# Altium PCB compressorPCB.PcbDoc
Units mm, origin at the board's own origin, x right, y up, seen from the top; angles counter-clockwise.
Board outline 53.25 x 72 mm, 2 copper layers (Top Layer, Bottom Layer); 27 components, 29 nets, 102 pads, 2 vias.
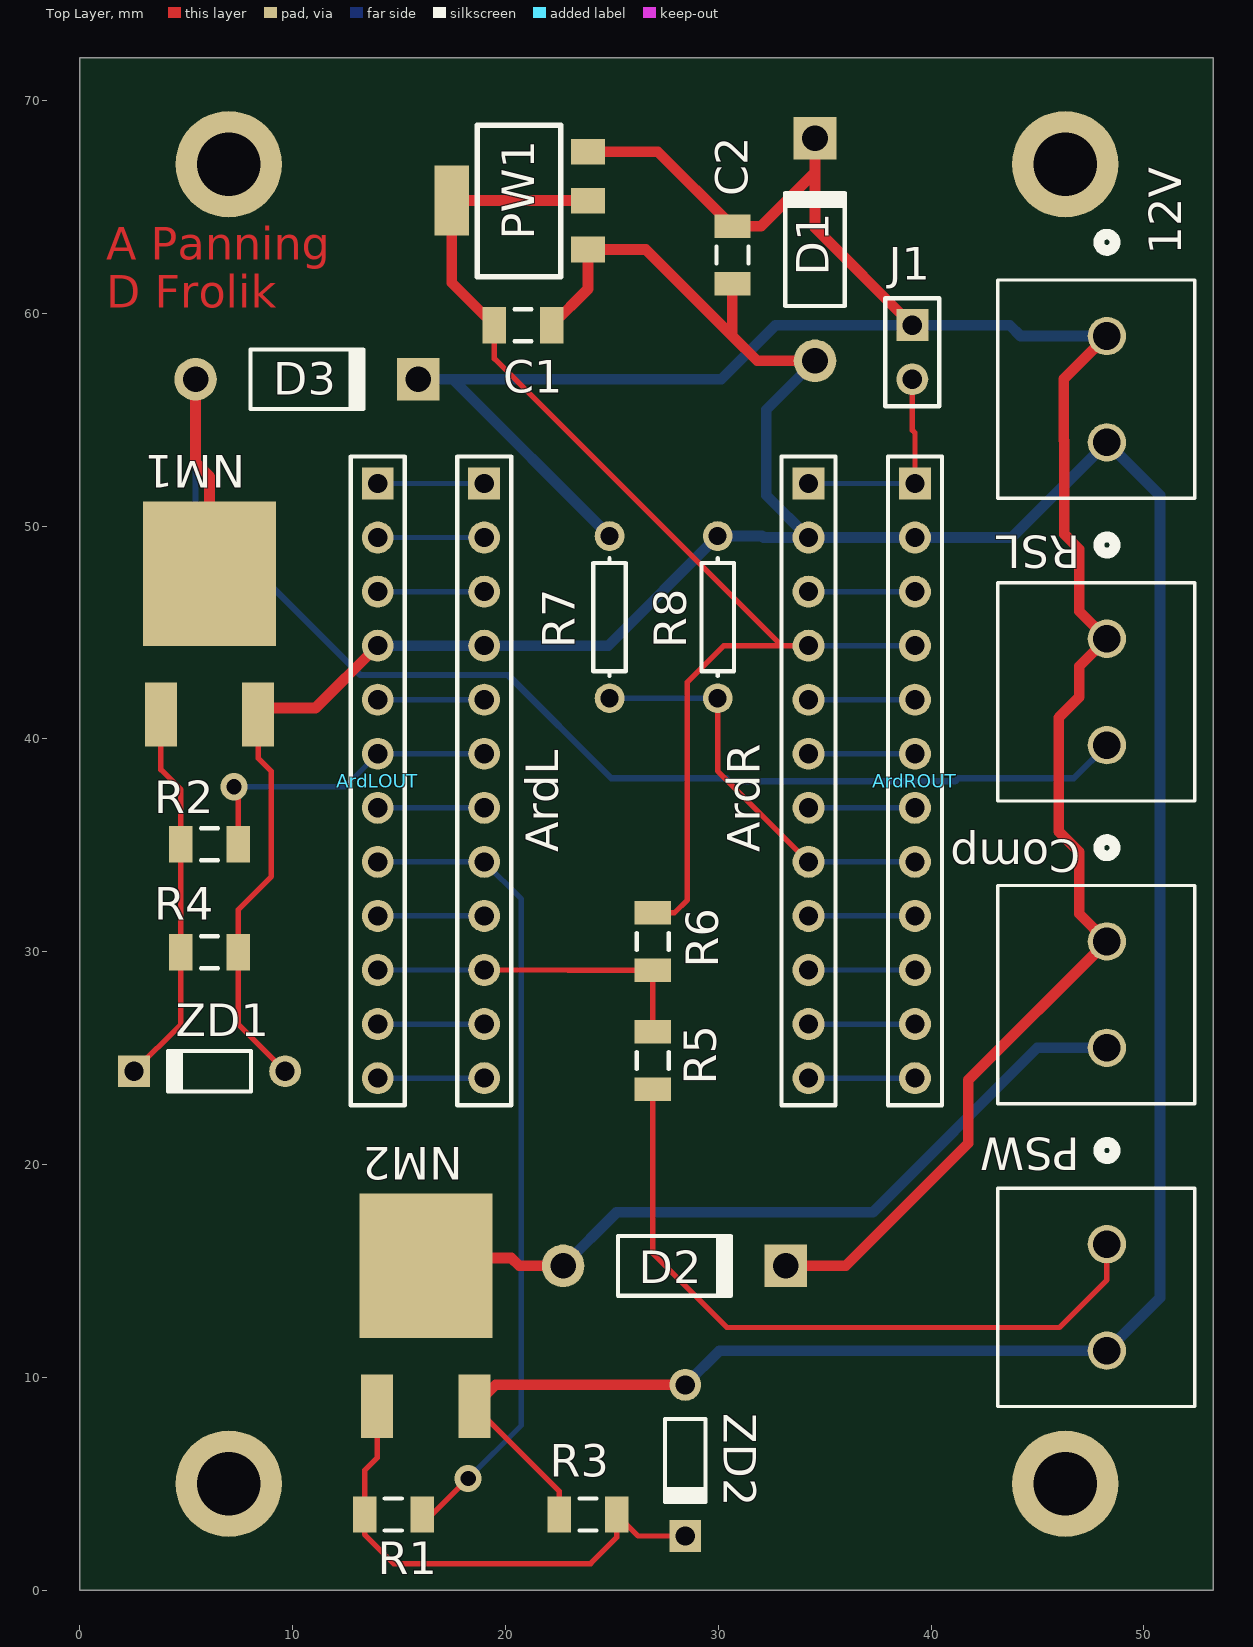
[diagram p0: Top Layer view]
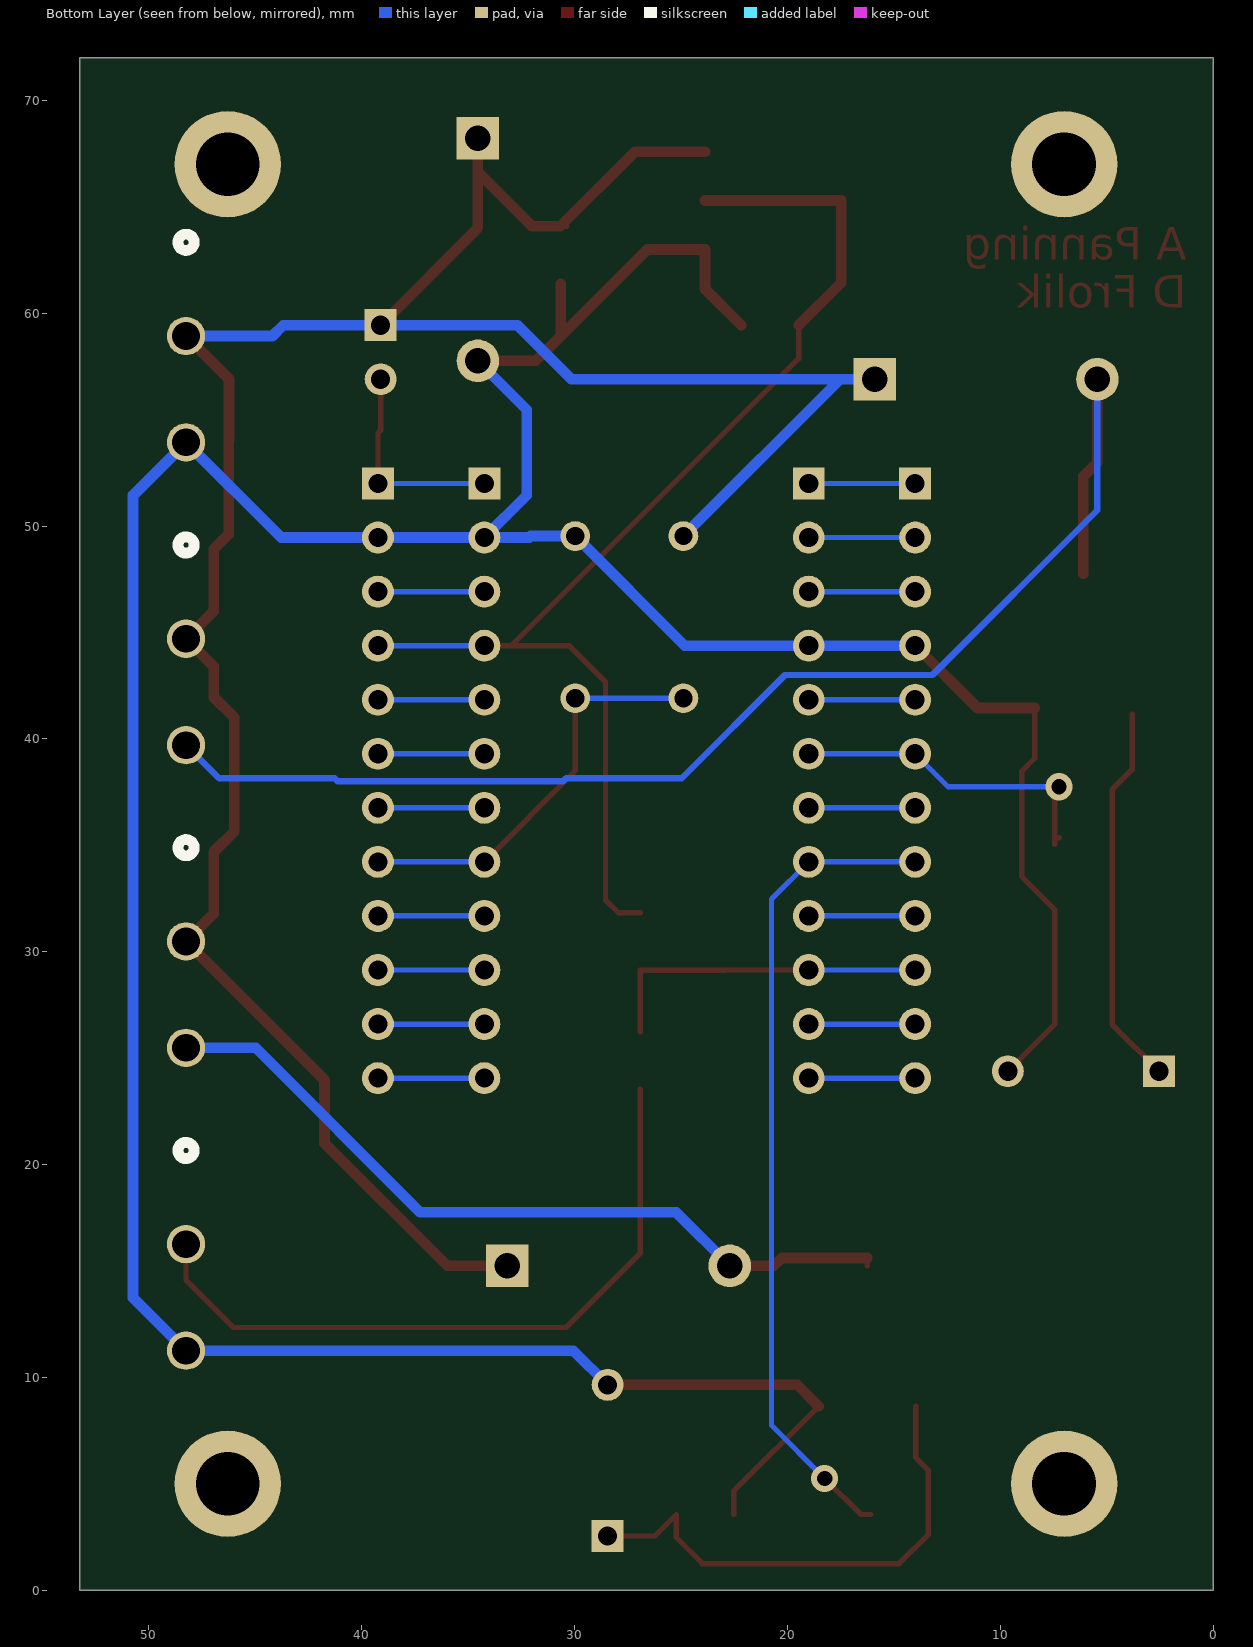
[diagram p1: Bottom Layer view, seen from below]

## Layer stack, top to bottom
Top Layer: signal copper 0.0356
Dielectric: dielectric 0.32, FR-4, Dk 4.8
Bottom Layer: signal copper 0.0356

## Board outline
0,0 0,72 53.25,72 53.25,0 0,0

## Design rules (kind name [scope] priority, off if disabled: settings)
Clearance [All] p1: gap=0.254
HoleSize [All] p1: absolutevalues=TRUE maxlimit=6.35 minlimit=0.2 maxpercent=80.000 minpercent=20.000
PolygonConnect [All] p1: connectstyle=Relief reliefconductorwidth=0.254 reliefentries=4 polygonreliefangle="90 Angle"
RoutingVias [All] p1: holewidth=0.711 width=1.27 viastyle="Through Hole" minholewidth=0.711 minwidth=1.27 maxholewidth=0.711 maxwidth=1.27
SilkToSilkClearance [All] p1: silktosilkclearance=0.2
SilkscreenOverComponentPads [All] p1: minsilkscreentomaskgap=0.2
SolderMaskExpansion [All] p1: expansion=0.102
Width [All] p1: maxlimit=5 minlimit=0.254 preferedwidth=0.254
25 further rules are at their usual default settings.

## Components (designator, comment, footprint, x,y, rotation, side; value= is the part's Value field where it differs from the comment)
12V "TB1" CONN_1935161_PXC 48.26,58.928 r270 top
ArdL "Header 12" HDR1X12 19,52 r270 top
ArdLOUT "Header 12" HDR1X12 14,52 r270 top
ArdR "Header 12" HDR1X12 34.24,52 r270 top
ArdROUT "Header 12" HDR1X12 39.24,52 r270 top
C1 "Cap Semi" CAPC3216L 20.828,59.436 r180 top
C2 "Cap Semi" CAPC3216L 30.67,62.734 r90 top
Comp "TB3" CONN_1935161_PXC 48.26,30.48 r270 top (schematic designator Compressor)
D1 "Diode 11DQ03TR" DIO10.46-5.3x2.8 34.544,62.992 r90 top
D2 "Diode 11DQ03TR" DIO10.46-5.3x2.8 27.94,15.24 r0 top
D3 "Diode 11DQ03TR" DIO10.46-5.3x2.8 10.668,56.896 r0 top
J1 "12PWR" HDR1X2 39.116,59.436 r270 top
NM1 "AOD454A NMOS" "TO252- no center pin" 6.096,47.752 r0 top
NM2 "AOD454A NMOS" "TO252- no center pin" 16.256,15.24 r0 top
PSW "TB4" CONN_1935161_PXC 48.26,16.256 r270 top (schematic designator PressureSW)
PW1 "ZLDO1117G50TA" SOT223 23.876,62.992 r90 top
R1 "Res Semi" RESC3216L 14.732,3.556 r0 top
R2 "Res Semi" RESC3216L 6.096,35.052 r0 top
R3 "Res Semi" RESC3216L 23.876,3.556 r0 top
R4 "Res Semi" RESC3216L 6.096,29.972 r180 top
R5 "Res Semi" RESC3216L 26.924,24.892 r90 top
R6 "Res Semi" RESC3216L 26.924,30.48 r270 top
R7 "49.9k" AXIAL-0.3 24.892,45.72 r90 top
R8 "Res1" AXIAL-0.3 29.972,45.72 r270 top
RSL "TB2" CONN_1935161_PXC 48.26,44.704 r270 top
ZD1 "Diode 1N5250B" DIO7.1-3.9x1.9 6.096,24.384 r180 top
ZD2 "Diode 1N5250B" DIO7.1-3.9x1.9 28.448,6.096 r270 top

## Footprints (in the part's own frame and the unit in brackets; to place one, negate y for a bottom-side part, rotate by r counter-clockwise, add the part's x,y. Pads: shape width x height; smd on the part's side, far side on the other; paste and mask are expansions set on the pad)
AXIAL-0.3 [mm] "Axial Device, Thru-Hole; 2 Leads; 0.3 in Pin Spacing"
  round 1.4 hole 0.85: 1(-3.81,0) 2(3.81,0)
  silkscreen extent -2.77,-0.76 2.77,0.76
CAPC3216L [mm] "Chip Capacitor, Body 3.2x1.6mm, IPC High Density"
  rect 1.1x1.7 smd: 1(-1.35,0) 2(1.35,0)
  silkscreen extent -0.4,-0.75 0.4,0.75, body extent -1.7,-0.9 1.7,0.9, height 1.3
CONN_1935161_PXC [mil]
  round 71 / inner round 60 / far side round 71 hole 51 paste-35.5 mask+0: 1(0,0) 2(196.85,0)
  silkscreen extent -188,-202 300,162
DIO7.1-3.9x1.9 [mm] "Diode, Axial; Body 3.8 x 1.9 mm (LxDia. max), Lead Dia. 0.53 mm (max)"
  round 1.5 hole 0.9: 1(-3.55,0)
  rect 1.5x1.5 hole 0.9: 2(3.55,0)
  silkscreen extent -1.95,-0.95 2.05,0.95
DIO10.46-5.3x2.8 [mm] "Diode, Axial; Body 5.2 x 2.7 mm (LxDia. max), Lead Dia. 0.86 mm (max)"
  round 2 hole 1.2: 1(-5.23,0)
  rect 2x2 hole 1.2: 2(5.23,0)
  silkscreen extent -2.65,-1.4 2.75,1.4
HDR1X2 [mm] "Connector; Header; 2 Position"
  rect 1.5x1.5 hole 0.9: 1(0,0)
  round 1.5 hole 0.9: 2(2.54,0)
  silkscreen extent -1.27,-1.27 3.81,1.27
HDR1X12 [mm] "Connector; Header; 12 Position"
  rect 1.5x1.5 hole 0.9: 1(0,0)
  round 1.5 hole 0.9: 2(2.54,0) 3(5.08,0) 4(7.62,0) 5(10.16,0) 6(12.7,0) 7(15.24,0) 8(17.78,0) 9(20.32,0) 10(22.86,0) 11(25.4,0) 12(27.94,0)
  silkscreen extent -1.27,-1.27 29.21,1.27
RESC3216L [mm] "Chip Resistor, Body 3.1x1.6mm, IPC High Density"
  rect 1.1x1.7 smd: 1(-1.35,0) 2(1.35,0)
  silkscreen extent -0.4,-0.75 0.4,0.75, body extent -1.68,-0.87 1.68,0.87, height 2.54
SOT223 [mm]
  rect 1.2x1.6 smd: 1(0,0) 2(2.3,0) 3(4.6,0)
  rect 3.3x1.6 smd: 4(2.3,6.4)
  silkscreen extent -1.27,1.27 5.84,5.21
"TO252- no center pin" [mm]
  rect 1.5x3 smd: 1(-2.286,-6.6) 3(2.286,-6.6)
  rect 6.25x6.8 smd: 4(0,0)

## Part data
12V Comp PSW RSL: library part 1935161, "No Description Available"
ArdL ArdLOUT ArdR ArdROUT: "Header, 12-Pin"
C1 C2: "Capacitor (Semiconductor SIM Model)"
D1 D2 D3: library part "Diode 1N4934", "1 Amp Fast Recovery Rectifier"
J1: library part "Header 2", "Header, 2-Pin"
R1 R2 R3 R4 R5 R6: "Semiconductor Resistor"
R7: library part Res1, "Resistor"
R8: "Resistor"
ZD1 ZD2: library part "Diode 1N4448", "High Conductance Fast Diode"

## Free pads (board coordinates)
  round 5 hole 3: H1(7,5) H2(7,67) H3(46.3,67) H4(46.3,5)

## Via types
v1: diameter 1.27, hole 0.711, Top Layer to Bottom Layer, 2 vias

## Nets (pads, with @x,y where several pads share a name; then routed paths per layer and width w, separated by ;. In a path a pad name is that pad's centre, name@x,y a point inside that pad or via, vN(x,y) a via of type N, cw(c..) or ccw(c..) an arc to the next point about the centre after c; other vN are vias at no path point)
+5V: ArdR.4 ArdROUT.4 C1.2 PW1.2 PW1.4 R6.1 | length 57.2
  Top Layer w0.254: C1.2 19.478,57.865 32.963,44.38 ; R6.1 27.94,31.83 28.55,32.44 28.55,42.672 30.258,44.38 32.963,44.38 ; ArdR.4 32.963,44.38
  Top Layer w0.5: C1.2 17.476,61.438 PW1.4 PW1.2
  Bottom Layer w0.254: ArdR.4 ArdROUT.4
+12V: 12V.1 C2.2 Comp.1 D1.2 D2.2 D3.2 J1.1 PW1.3 R7.2 RSL.1 | length 123.5
  Top Layer w0.254: D3.2@15.723,56.896 D3.2 ; C2.2@30.378,64.084 C2.2 ; 46.238,54.022 46.25,54.01
  Top Layer w0.5: PW1.3 27.162,67.592 C2.2 32.004,64.084 34.544,66.624 ; D2.2 35.99,15.24 41.75,21 41.75,23.97 Comp.1 46.965,31.775 46.965,34.684 46,35.648 46,41 46.965,41.965 46.965,43.409 RSL.1 46.965,45.999 46.965,48.908 46.25,49.622 46.25,54.01 ; D1.2 34.544,66.624 ; J1.1 34.544,64.008 34.544,66.624 ; 46.238,54.022 46.238,56.906 46.965,57.633 12V.1
  Bottom Layer w0.5: D3.2 17.526,56.896 ; R7.2 17.526,56.896 ; 12V.1 44.196,58.928 43.688,59.436 J1.1 32.686,59.436 30.146,56.896 17.526,56.896
A0: ArdR.8 ArdROUT.8 R7.1 R8.2 | length 19.5
  Top Layer w0.254: R8.2 29.972,38.488 ArdR.8
  Bottom Layer w0.254: R7.1 R8.2 ; ArdR.8 ArdROUT.8
A1: ArdR.7 ArdROUT.7 | length 5
  Bottom Layer w0.254: ArdR.7 ArdROUT.7
A2: ArdR.6 ArdROUT.6 | length 5
  Bottom Layer w0.254: ArdR.6 ArdROUT.6
A3: ArdR.5 ArdROUT.5 | length 5
  Bottom Layer w0.254: ArdR.5 ArdROUT.5
D2: ArdL.5 ArdLOUT.5 | length 5
  Bottom Layer w0.254: ArdLOUT.5 ArdL.5
D3: ArdL.6 ArdLOUT.6 R2.2 | length 15.7
  Top Layer w0.254: R2.2@7.239,35.357 7.446,35.357 R2.2 7.446,37.554 v1(7.25,37.75)
  Bottom Layer w0.254: v1(7.25,37.75) 12.45,37.75 ArdLOUT.6 ArdL.6
D4: ArdL.7 ArdLOUT.7 | length 5
  Bottom Layer w0.254: ArdLOUT.7 ArdL.7
D5: ArdL.8 ArdLOUT.8 R1.2 | length 38.6
  Top Layer w0.254: R1.2 16.556,3.556 v1(18.25,5.25)
  Bottom Layer w0.254: ArdLOUT.8 ArdL.8 20.75,32.47 20.75,7.75 v1(18.25,5.25)
D6: ArdL.9 ArdLOUT.9 | length 5
  Bottom Layer w0.254: ArdLOUT.9 ArdL.9
D7: ArdL.10 ArdLOUT.10 R5.2 R6.2 | length 15.8
  Top Layer w0.254: ArdL.10 22.936,29.14 22.946,29.13 R6.2 R5.2
  Bottom Layer w0.254: ArdLOUT.10 ArdL.10
D8: ArdL.11 ArdLOUT.11 | length 5
  Bottom Layer w0.254: ArdLOUT.11 ArdL.11
D9: ArdL.12 ArdLOUT.12 | length 5
  Bottom Layer w0.254: ArdLOUT.12 ArdL.12
D10: ArdR.12 ArdROUT.12 | length 5
  Bottom Layer w0.254: ArdR.12 ArdROUT.12
D11: ArdR.11 ArdROUT.11 | length 5
  Bottom Layer w0.254: ArdR.11 ArdROUT.11
D12: ArdR.10 ArdROUT.10 | length 5
  Bottom Layer w0.254: ArdR.10 ArdROUT.10
D13: ArdR.9 ArdROUT.9 | length 5
  Bottom Layer w0.254: ArdR.9 ArdROUT.9
GND: 12V.2 ArdL.4 ArdLOUT.4 ArdR.2 ArdROUT.2 C1.1 C2.1 D1.1 NM1.3 NM2.3 PSW.2 PW1.1 R3.1 R4.1 R8.1 ZD1.1 ZD2.1 | length 175.7
  Top Layer w0.254: NM1.3@8.382,41.453 NM1.3 8.382,39.094 9,38.476 9,35.595 9,33.536 7.446,31.982 R4.1 7.446,26.584 ZD1.1 ; NM2.3 22.526,4.656 R3.1 ; C2.1@30.658,61.384 C2.1 C2.1@30.658,61.384
  Top Layer w0.5: NM1.3@8.382,41.453 11.073,41.453 ArdLOUT.4 ; NM2.3 19.548,9.646 ZD2.1 ; C1.1 23.876,61.134 PW1.1 26.594,62.992 30.658,58.928 ; C2.1@30.658,61.384 30.658,58.928 ; D1.1 31.824,57.762 30.658,58.928
  Bottom Layer w0.5: ArdLOUT.4 ArdL.4 24.822,44.38 R8.1 32.055,49.53 32.125,49.46 ArdR.2 ; ZD2.1 30.058,11.256 PSW.2 50.75,13.746 50.75,51.438 12V.2 43.792,49.46 ArdROUT.2 ArdR.2 ; D1.1@34.544,57.254 34.036,57.254 32.25,55.468 32.25,51.45 ArdR.2
NetCompressor_2: Comp.2 D2.1 NM2.4 | length 36.8
  Top Layer w0.254: NM2.4 NM2.4@16.256,15.611
  Top Layer w0.5: NM2.4@16.256,15.611 20.27,15.611 20.641,15.24 D2.1
  Bottom Layer w0.5: D2.1 25.22,17.75 37.25,17.75 44.98,25.48 Comp.2
NetD3_1: D3.1 NM1.4 RSL.2 | length 64.4
  Top Layer w0.5: D3.1 5.438,52.982 6.096,52.324 NM1.4
  Bottom Layer w0.3: D3.1 5.438,50.747 13.185,43 20.119,43 24.968,38.151 30.403,38.151 30.554,38 41.121,38 41.272,38.151 46.707,38.151 RSL.2
NetNM1_1: NM1.1 R2.1 R4.2 ZD1.2 | length 18.1
  Top Layer w0.254: ZD1.2 4.746,26.584 R4.2 R2.1 4.746,37.617 3.81,38.553 NM1.1
NetNM2_1: NM2.1 R1.1 R3.2 ZD2.2 | length 23.9
  Top Layer w0.254: NM2.1 13.97,6.22 13.382,5.632 R1.1 13.382,2.618 14.75,1.25 24,1.25 25.226,2.476 R3.2 26.236,2.546 ZD2.2
NetPressureSW_1: PSW.1 R5.1 | length 33.1
  Top Layer w0.254: R5.1 26.924,15.826 30.406,12.344 46.025,12.344 48.26,14.58 PSW.1
RAW: ArdR.1 ArdROUT.1 J1.2 | length 9.9
  Top Layer w0.254: J1.2 39.116,54.505 39.24,54.381 ArdROUT.1
  Bottom Layer w0.254: ArdR.1 ArdROUT.1
RST: ArdL.3 ArdLOUT.3 | length 5
  Bottom Layer w0.254: ArdLOUT.3 ArdL.3
RST2: ArdR.3 ArdROUT.3 | length 5
  Bottom Layer w0.254: ArdR.3 ArdROUT.3
RX1: ArdL.2 ArdLOUT.2 | length 5
  Bottom Layer w0.254: ArdLOUT.2 ArdL.2
TX0: ArdL.1 ArdLOUT.1 | length 5
  Bottom Layer w0.254: ArdLOUT.1 ArdL.1

## Other copper
Top Layer:
  text "A Panning" at 1.25,62.5 h1.52
  text "D Frolik" at 1.25,60.25 h1.52

## Silkscreen, mask and mechanical layers (free items; w line width, h text height)
Mechanical 1:
  the board outline again, w0.254